# Altium PCB CAN_PCB.PcbDoc
Units mm, origin at the board's own origin, x right, y up, seen from the top; angles counter-clockwise.
Board outline 27.66 x 40.2 mm, 2 copper layers (Top Layer, Bottom Layer); 16 components, 16 nets, 63 pads, 6 vias.
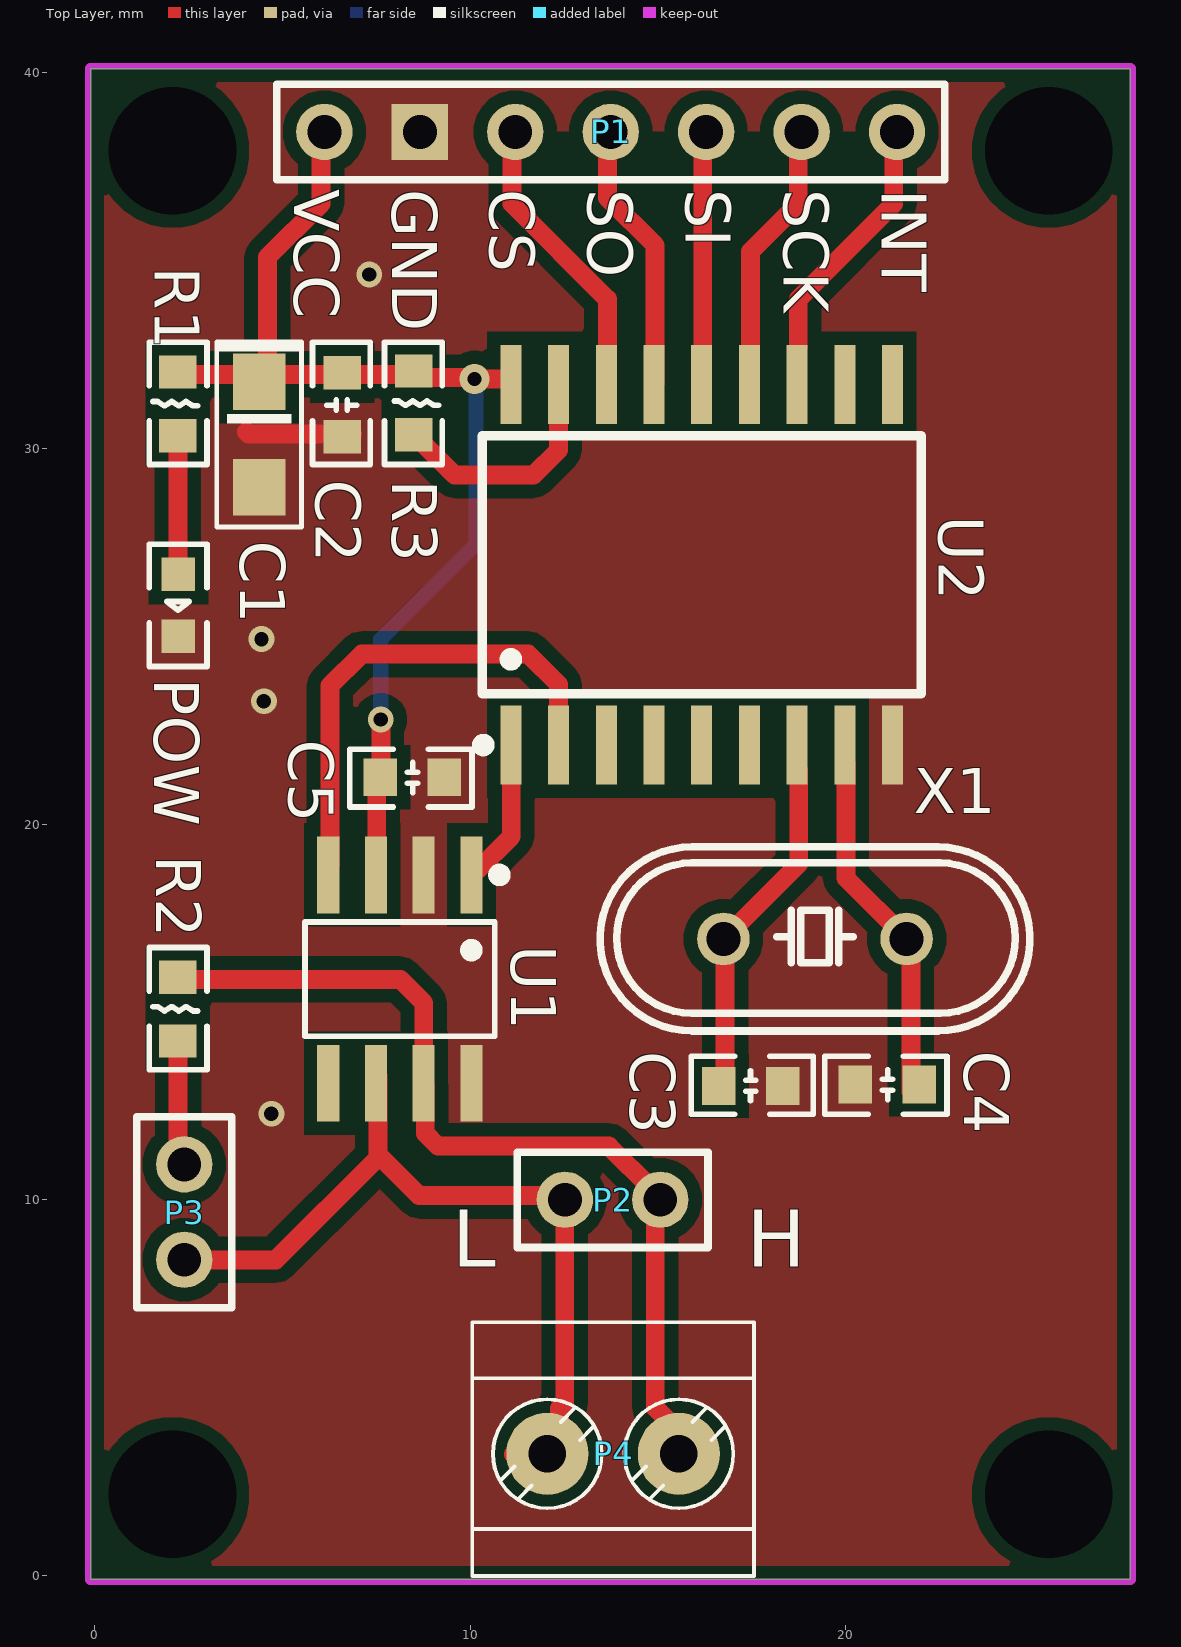
[diagram p0: Top Layer view]
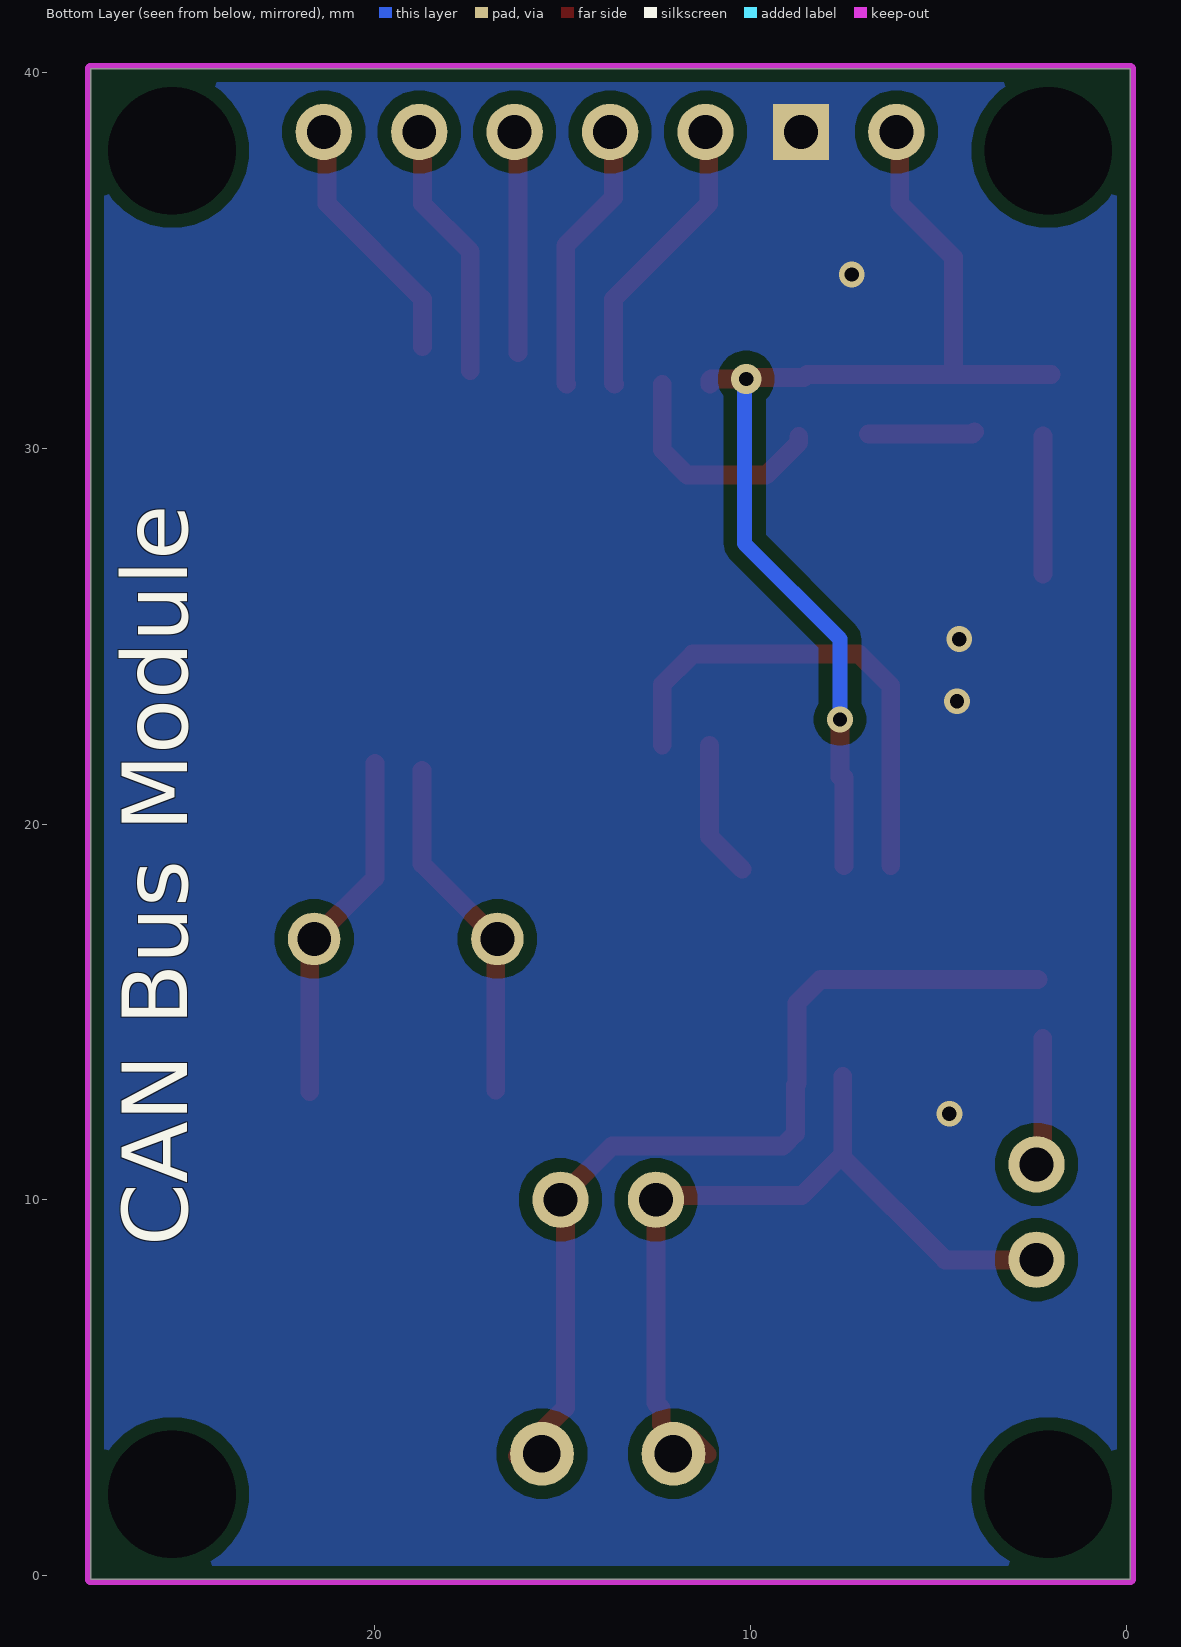
[diagram p1: Bottom Layer view, seen from below]
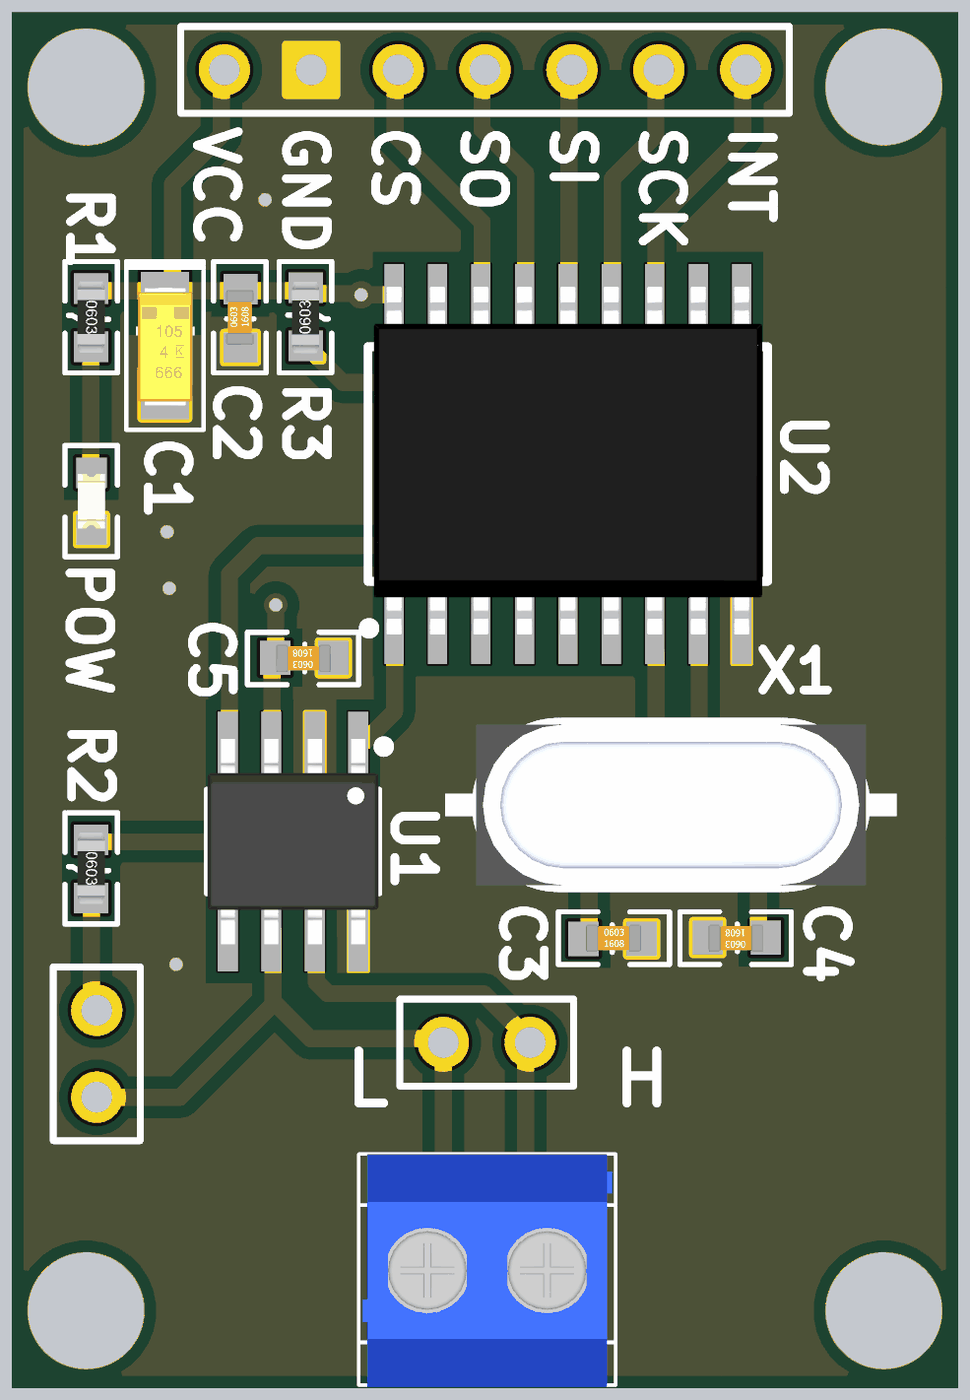
[diagram p2: 3D render of the assembled board from above, using the file's embedded part models]

## Layer stack, top to bottom
Top Solder: solder mask 0.0102, Solder Resist, Dk 3.5
Top Layer: signal copper 0.0356
Dielectric 1: dielectric 0.32, FR-4, Dk 4.8
Bottom Layer: signal copper 0.0356
Bottom Solder: solder mask 0.0102, Solder Resist, Dk 3.5

## Board outline
-0.1,-0.1 27.564,-0.1 27.564,40.105 -0.1,40.105

## Design rules (kind name [scope] priority, off if disabled: settings)
Clearance [All] p1: gap=0.35 ignorepadtopadclearanceinfootprint=FALSE
PlaneConnect [All] p1: planeconnectstyle=Direct reliefexpansion=0.508 reliefentries=4 reliefconductorwidth=0.254 reliefairgap=0.254
PolygonConnect [All] p1: connectstyle=Direct reliefconductorwidth=0.254 reliefentries=4 polygonreliefangle="90 Angle" airgapwidth=0.254
RoutingVias [All] p1: holewidth=0.711 width=1.27 viastyle="Through Hole" minholewidth=0.711 minwidth=1.27 maxholewidth=0.711 maxwidth=1.27
SolderMaskExpansion [All] p1: expansion=0.102 istentingtop=FALSE
Width [All] p1: maxlimit=2 minlimit=0.15 preferedwidth=0.254
29 further rules are at their usual default settings.

## Components (designator, comment, footprint, x,y, rotation, side; value= is the part's Value field where it differs from the comment)
C1 "10uF/16V" "tantalum  A" 4.384,30.37 r270 top
C2 "100nF" C0603 6.591,31.159 r90 top
C3 "22pF" C0603 17.471,13.03 r0 top
C4 "22pF" C0603 21.101,13.068 r180 top
C5 "100nF" C0603 8.458,21.243 r180 top
P1 "Header 7" HDR1X7 21.36,38.422 r180 top
P2 "Header 2" HDR1X2 15.049,10.008 r180 top
P3 "Header 2" HDR1X2 2.397,8.415 r90 top
P4 "Terminal Block 3.5mmPitch: 3,5 mmNumber of pins: 2Created by Rembrandt Electronicswww.rembrandtelectronics.com" TERMINAL-BLOCK-2-PIN-3.5MM-ROUND-PAD 13.804,3.341 r0 top
POW "RED LED" CHIPLED_0603 2.234,25.82 r180 top
R1 "1kΩ" R0603 2.222,31.183 r270 top
R2 "120Ω" R0603 2.222,15.077 r270 top
R3 "10kΩ" R0603 8.497,31.208 r90 top
U1 "TJA1050DRG" SOIC-8E 8.128,15.875 r270 top
U2 "MCP2515-I" SOIC-18_L11.6-W7.5-P1.27-LS10.3-BL 16.162,26.904 r0 top
X1 "8MHz" HC-49US_L11.5-W4.5-P4.88 19.178,16.943 r180 top

## Footprints (in the part's own frame and the unit in brackets; to place one, negate y for a bottom-side part, rotate by r counter-clockwise, add the part's x,y. Pads: shape width x height; smd on the part's side, far side on the other; paste and mask are expansions set on the pad)
C0603 [mm]
  rect 0.889x1 smd: 1(-0.85,0) 2(0.85,0)
  silkscreen extent -1.59,-0.75 1.66,0.79, body extent -0.77,-0.38 0.83,0.42, height 0.8
CHIPLED_0603 [mil]
  rect 35x35 smd: A(0,-32.5) C(0,32.5)
  silkscreen extent -30,-64 31,64, body extent -16,-31 16,31, height 22
HC-49US_L11.5-W4.5-P4.88 [mm]
  round 1.4 hole 0.9: 1(-2.438,0) 2(2.438,0)
  silkscreen extent -5.72,-2.45 5.72,2.45, body extent -6.6,-2.35 6.6,2.35, height 2.6
HDR1X2 [mm]
  round 1.5 hole 0.9: 1(-0.011,0.007) 2(2.529,0.007)
  silkscreen extent -1.28,-1.26 3.8,1.28
HDR1X7 [mm] "Connector; Header; 7 Position"
  round 1.5 hole 0.9: 1(0,0) 2(2.54,0) 3(5.08,0) 4(7.62,0) 5(10.16,0) 7(15.24,0)
  rect 1.5x1.5 hole 0.9: 6(12.7,0)
  silkscreen extent -1.27,-1.27 16.51,1.27
R0603 [mm]
  rect 0.889x1 smd: 1(-0.85,0) 2(0.85,0)
  silkscreen extent -1.64,-0.76 1.61,0.77, body extent -1.07,-0.39 1.03,0.41, height 0.5
SOIC-8E [mm] "SOIC, 8-Leads, Body 4.90x3.90mm, Pitch 1.27mm, IPC Medium Density"
  rect 2.045x0.588 smd paste+0 mask+0.051: 1(-2.773,1.905) 2(-2.773,0.635) 3(-2.773,-0.635) 4(-2.773,-1.905) 5(2.773,-1.905) 6(2.773,-0.635) 7(2.773,0.635) 8(2.773,1.905)
  silkscreen extent -2.92,-2.53 1.52,2.8, body extent -3,-2.5 3,2.5, height 1.75
SOIC-18_L11.6-W7.5-P1.27-LS10.3-BL [mm]
  rect 0.56x2.1 smd paste+0 mask+0.051: 1(-5.08,-4.8) 2(-3.81,-4.8) 3(-2.54,-4.8) 4(-1.27,-4.8) 5(0,-4.8) 6(1.27,-4.8) 7(2.54,-4.8) 8(3.81,-4.8) 9(5.08,-4.8) 10(5.08,4.8) 11(3.81,4.8) 12(2.54,4.8) 13(1.27,4.8) 14(0,4.8) 15(-1.27,4.8) 16(-2.54,4.8) 17(-3.81,4.8) 18(-5.08,4.8)
  silkscreen extent -5.96,-4.95 5.84,3.43, body extent -5.68,-4.98 5.68,5.18, height 2
"tantalum  A" [mm]
  rect 1.5x1.4 smd: 1(-1.4,0) 2(1.4,0)
  silkscreen extent -2.46,-1.13 2.46,1.13, body extent -1.69,-0.79 1.77,0.81, height 1.64
TERMINAL-BLOCK-2-PIN-3.5MM-ROUND-PAD [mm]
  round 2.184 / inner round 1.524 / far side round 1.7 hole 1: 1(-1.75,-0.1) 2(1.75,-0.1)
  silkscreen extent -3.75,-3.35 3.75,3.4, body extent -3.65,-3.4 3.65,3.4, height 8.4

## Part data
C1: library part Cap_Tantalum, "SMD Tantalum Capacitor"
C2 C3 C4 C5: library part Cap_0603, "Capacitor, X5R, ±10%, 6.3V", Manufacturer=N.A., Part Number=C0603-N.C., Volts=6.3V, Artikkelnr Noca=20069060, Artikkelnr Simpro=N.A., Footprint Doc=0603, LatestRevisionDate=2009-11-23, Manufacturer Part Number=N.A., Pin Count=2, Published=2009-05-08, Publisher="Nordic Semiconductor"
P1: "Header, 7-Pin", LatestRevisionDate=17-Jul-2002, LatestRevisionNote="Re-released for DXP Platform.", Publisher="Altium Limited"
P2 P3: "Header, 2-Pin", LatestRevisionDate=17-Jul-2002, LatestRevisionNote="Re-released for DXP Platform.", Publisher="Altium Limited"
P4: library part TERMINAL-3.50-2P, "Screw Terminal 3.5mm", GateName_1=-1, SymbolName_1=TERMINAL-BLOCK-PIN-3.5MM
POW: library part LEDCHIP-LED0603, "SMD lamp beads"
R1 R2 R3: library part Res_0603, "Resistor, ±1%, 0.100W", Manufacturer=N.A., Part Number=R0603-N.C.Ω, Artikkelnr Noca=N.A., Artikkelnr Simpro=N.A., Footprint Doc=0603, LatestRevisionDate=2009-05-08, Manufacturer Part Number=N.A., Note="Chip Res", Pin Count=2, Published=2009-05-08, Publisher="Nordic Semiconductor"
U1: "CAN Transiver", JLCPCB Part Class="Extended Part", Manufacturer=HGC(深圳汉芯), Add into BOM=yes, Convert to PCB=yes, Datasheet=https://atta.szlcsc.com/upload/public/pdf/source/20231229/9EC40A6172CAB0350BF7AF3421F4DEBF.pdf, Device=TJA1050DRG, LCSC Part Name=TJA1050DRG, Manufacturer Part=TJA1050DRG, Supplier=LCSC, Supplier Footprint=SOP-8, Supplier Part=C19723770, Symbol=TJA1050DRG
U2: library part MCP2515, "CAN Controller", JLCPCB Part Class="Extended Part", LCSC Part Name=CAN芯片, Manufacturer=Tokmas(托克马斯), Add into BOM=yes, Convert to PCB=yes, Datasheet=https://atta.szlcsc.com/upload/public/pdf/source/20221108/54102364C5045B746FF767DA10992A5D.pdf, Device=MCP2515-I, Manufacturer Part=MCP2515-I, Supplier=LCSC, Supplier Footprint=TSSOP-20, Supplier Part=C5250735, Symbol=MCP2515-I
X1: library part CRYSTAL-ECS-100-20-5PVX, "10MHz Â±30ppm Crystal 20pF 60 Ohms HC-49/US", Package="HC49/US ECS International", Availability=Warning, Check_prices=https://www.snapeda.com/parts/ECS-100-20-5PVX/ECS%20Inc./view-part/2721546/?ref=eda, MF="ECS Inc.", MP=ECS-100-20-5PVX, Price=None, SnapEDA_Link=https://www.snapeda.com/parts/ECS-100-20-5PVX/ECS%20Inc./view-part/2721546/?ref=snap

## Free pads (board coordinates)
  round 3.2 hole 3.4: M2(2.076,2.165) M2(2.076,37.923) M2(25.397,2.165) M2(25.397,37.923)

## Via types
v1: diameter 0.686, hole 0.381, Top Layer to Bottom Layer, tented both sides, 5 vias
v2: diameter 0.8, hole 0.381, Top Layer to Bottom Layer, tented both sides, 1 vias

## Nets (pads, with @x,y where several pads share a name; then routed paths per layer and width w, separated by ;. In a path a pad name is that pad's centre, name@x,y a point inside that pad or via, vN(x,y) a via of type N, cw(c..) or ccw(c..) an arc to the next point about the centre after c; other vN are vias at no path point)
GND: C1.2 C2.1 C3.2 C4.2 C5.1 P1.6 POW.C U1.2 U1.8 U2.9 | length 2.9
  Top Layer w0.5: 4.041,30.442 4.103,30.38 C2.1@6.866,30.38
  other v1: 4.709,12.289 4.509,23.271 4.445,24.924 7.311,34.625
NetC3_1: C3.1 U2.7 X1.2 | length 9
  Top Layer w0.5: X1.2@16.722,16.813 16.783,16.751 C3.1@16.783,12.916 ; X1.2@16.907,17.102 18.742,18.937 U2.7@18.742,21.432
NetC4_1: C4.1 U2.8 X1.1 | length 9.3
  Top Layer w0.5: U2.8@20,21.617 20,18.566 X1.1@21.608,16.958 ; X1.1@21.567,16.793 21.732,16.628 C4.1@21.732,12.875
NetP1_1: P1.1 U2.12 | length 6.8
  Top Layer w0.5: U2.12@18.732,32.703 18.732,33.972 21.273,36.512 21.273,38.259 P1.1@21.114,38.417
NetP1_2: P1.2 U2.13 | length 6.4
  Top Layer w0.5: U2.13@17.462,32.067 17.462,35.242 18.732,36.512 P1.2@18.732,37.941
NetP1_3: P1.3 U2.14 | length 5.8
  Top Layer w0.5: P1.3@16.034,38.259 16.192,38.1 U2.14@16.192,32.544
NetP1_4: P1.4 U2.15 | length 6.8
  Top Layer w0.5: P1.4@13.652,37.941 13.652,36.671 14.922,35.401 14.922,33.179 14.922,31.734 U2.15
NetP1_5: P1.5 U2.16 | length 8.3
  Top Layer w0.5: P1.5@11.271,38.894 11.112,38.735 11.112,36.512 13.652,33.972 13.652,33.417 13.652,31.734 U2.16
NetP2_1: P2.1 P4.2 R2.1 U1.7 | length 24
  Top Layer w0.5: R2.1@2.35,15.865 8.138,15.865 8.763,15.24 U1.7 8.806,13.06 8.806,11.768 9.144,11.43 13.693,11.43 P2.1@14.845,10.277 ; P2.1@14.928,9.886 14.928,4.463 P4.2@16.206,3.184
NetP2_2: P2.2 P3.1 P4.1 U1.6 | length 21.3
  Top Layer w0.5: P3.1@2.433,8.401 4.825,8.401 7.546,11.123 U1.6@7.546,13.288 ; 7.567,11.184 8.639,10.112 P2.2@12.454,10.112 ; P4.1@11.155,3.226 11.612,3.683 12.04,3.683 12.376,4.018 12.376,4.447 12.52,4.591 P2.2
NetP3_2: P3.2 R2.2 | length 3.3
  Top Layer w0.5: P3.2@2.227,11.02 R2.2@2.227,14.298
NetPOW_A: POW.A R1.2 | length 3.7
  Top Layer w0.5: POW.A@2.222,26.658 R1.2
NetR3_1: R3.1 U2.17 | length 6.2
  Top Layer w0.5: R3.1@8.722,30.319 8.722,30.154 9.588,29.288 11.684,29.288 12.352,29.956 U2.17
NetU1_1: U1.1 U2.1 | length 3.7
  Top Layer w0.5: U1.1@10.222,18.797 11.093,19.668 U2.1@11.093,22.093
NetU1_4: U1.4 U2.2 | length 13.2
  Top Layer w0.5: U1.4@6.268,18.896 6.268,23.679 7.113,24.525 11.543,24.525 12.352,23.716 U2.2
VCC: C1.1 C2.2 C5.2 P1.7 R1.1 R3.2 U1.3 U2.18 | length 30.1
  Top Layer w0.5: R1.1@2,31.968 6.845,31.968 8.497,31.968 8.582,31.883 10.081,31.883 v2(10.116,31.848) 11.052,31.848 11.082,31.818 U2.18 ; C1.1@4.604,32.226 4.604,35.084 6.032,36.512 P1.7@6.032,38.576 ; U1.3@7.512,18.892 C5.2@7.512,21.243 ; C5.2@7.623,21.258 v1@7.623,22.699
  Bottom Layer w0.4: v1@7.62,22.86 7.62,24.924 10.16,27.464 10.16,31.804 v2(10.116,31.848)
  other v1: 7.622,22.785
pads on no net: U1.5 U2.3 U2.4 U2.5 U2.6 U2.10 U2.11

## Polygon pours and split planes (outlines as drawn)
GND on Top Layer "NONET_L02_P-001" (solid, remove dead copper, pour order 0): 0,-0.127 0.127,-0.254 27.559,-0.254 27.559,40.259 0,40.259 0,-0.254
GND on Bottom Layer "NONET_L02_P-001" (solid, remove dead copper, pour order 1): 0,-0.127 0.127,-0.254 27.686,-0.254 27.686,40.132 27.559,40.259 0,40.259 0,0

## Keep-outs
Keep-Out Layer:
  lines w0.152: -0.176,-0.1 ccw(c-0.1,-0.1) -0.1,-0.176 ; -0.176,-0.1 ccw(c-0.1,-0.1) -0.1,-0.176 ; -0.176,-0.1 -0.176,40.105 ; -0.176,40.105 cw(c-0.1,40.105) -0.1,40.181 ; -0.176,40.105 cw(c-0.1,40.105) -0.1,40.181 ; -0.1,-0.176 27.564,-0.176 ; -0.1,40.181 27.564,40.181 ; 27.564,-0.176 ccw(c27.564,-0.1) 27.64,-0.1 ; 27.564,-0.176 ccw(c27.564,-0.1) 27.64,-0.1 ; 27.564,40.181 cw(c27.564,40.105) 27.64,40.105 ; 27.564,40.181 cw(c27.564,40.105) 27.64,40.105 ; 27.64,-0.1 27.64,40.105

## Other copper
Top Layer:
  pour cut-out: 11.327,38.422 21.487,38.422 21.487,38.076 21.59,37.973 11.303,37.973 11.303,38.397

## Silkscreen, mask and mechanical layers (free items; w line width, h text height)
Top Overlay:
  lines w0.127: 3.28,32.638 5.486,32.638 ; 5.508,32.601 5.508,32.715 3.254,32.715 3.254,32.517 3.254,32.834 5.514,32.834 5.514,32.517
  text "VCC" at 5.313,36.897 h1.2 r270
  text "GND" at 7.92,36.897 h1.2 r270
  text "CS" at 10.528,36.897 h1.2 r270
  text "SO" at 13.135,36.897 h1.2 r270
  text "SI" at 15.742,36.897 h1.2 r270
  text "SCK" at 18.349,36.897 h1.2 r270
  text "INT" at 20.956,36.897 h1.2 r270
  text "L" at 9.521,8.221 h1.52
  text "H" at 17.358,8.221 h1.52
Bottom Overlay:
  text "CAN Bus Module" at 24.417,8.763 h3 r270